# Altium PCB Pigeon.PcbDoc
Units mil, origin at the board's own origin, x right, y up, seen from the top; angles counter-clockwise.
Board outline 1377.95 x 590.55 mil, 2 copper layers (Top Layer, Bottom Layer), stack 46.444 mil thick; 39 components, 32 nets, 124 pads, 27 vias.
Unrouted connection lines stored in the file: 21.
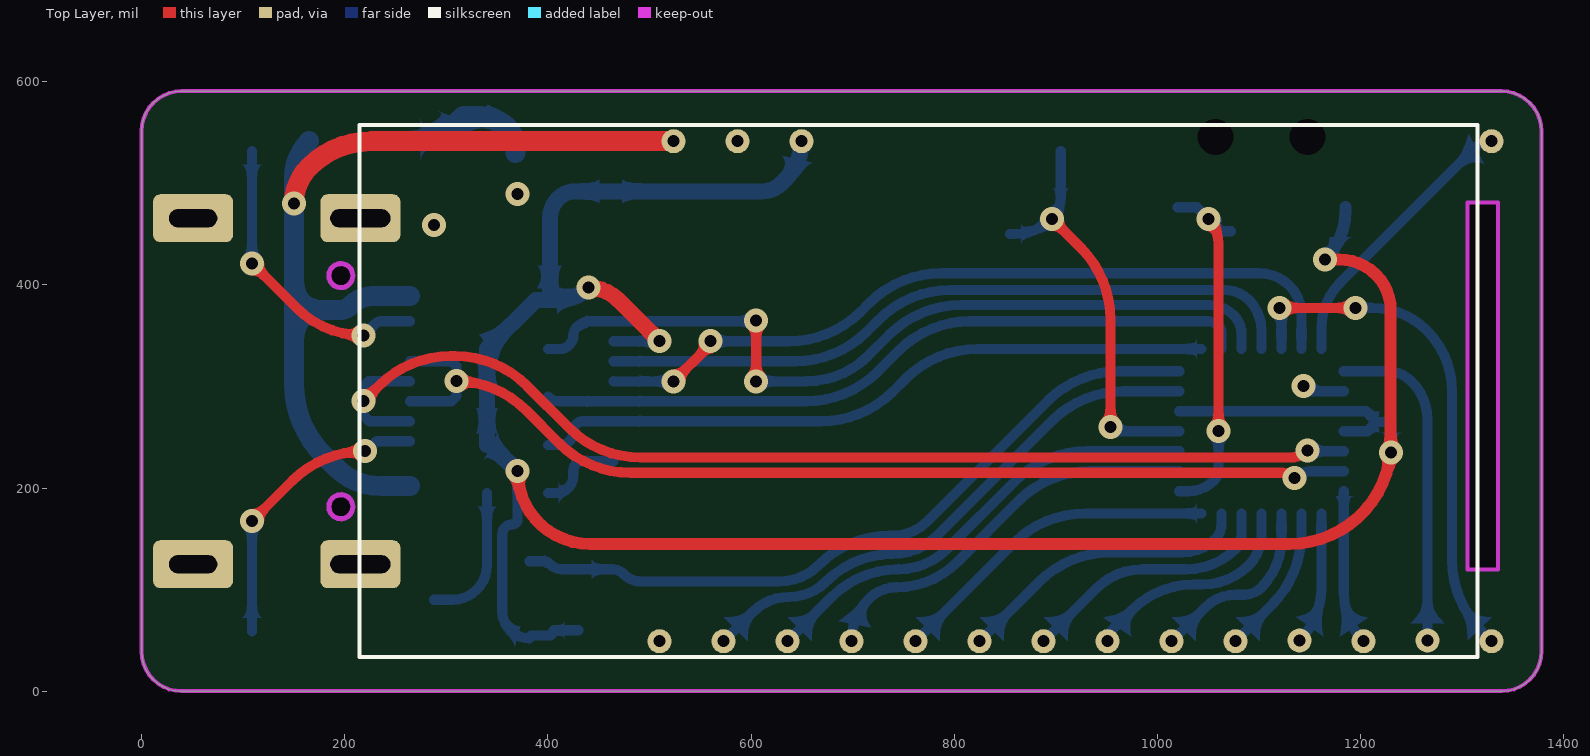
[diagram p0: Top Layer view]
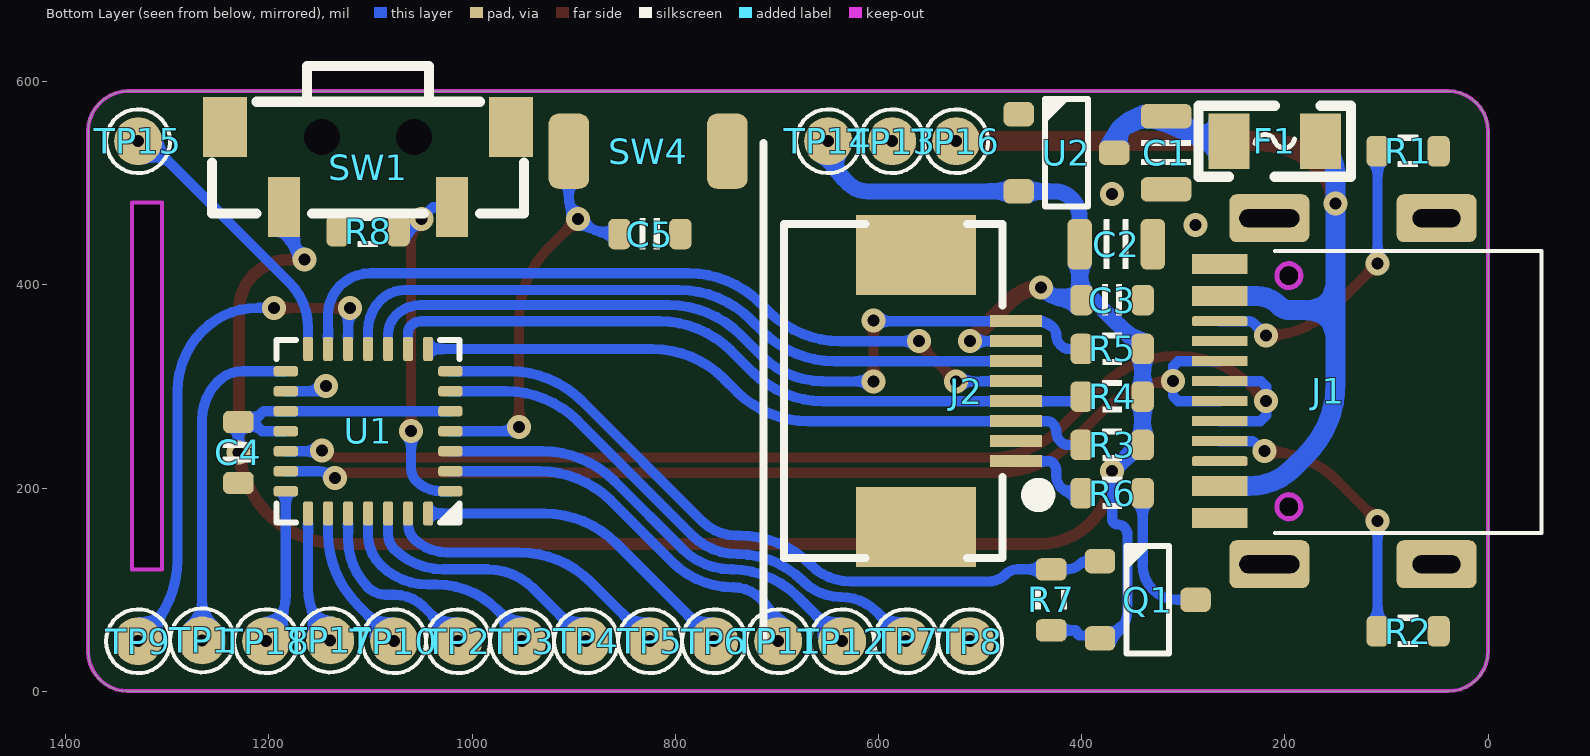
[diagram p1: Bottom Layer view, seen from below]
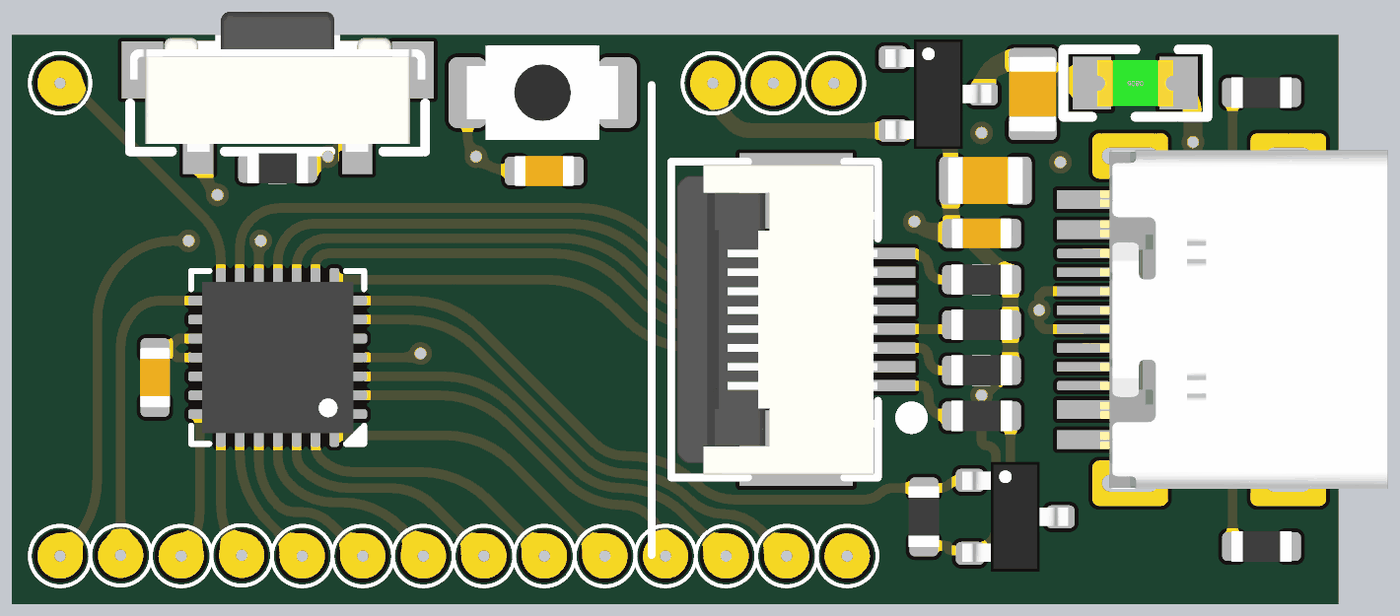
[diagram p2: 3D render of the assembled board from below, using the file's embedded part models]

## Layer stack, top to bottom
Top Solder: solder mask 0.4, Solder Resist, Dk 3.5
Top Layer: signal copper 1.4
Dielectric 1: dielectric 43.6441, FR-4, Dk 14
Bottom Layer: signal copper 1.4
Bottom Solder: solder mask 0.4, Solder Resist, Dk 3.5

## Board outline
39.37,0 cw(c39.37,39.37) 0,39.37 0,551.18 cw(c39.37,551.18) 39.37,590.55 1338.58,590.55 cw(c1338.58,551.18) 1377.95,551.18 1377.95,39.37 cw(c1338.58,39.37) 1338.58,0
cut-out: 1305,120 1335,120 1335,480.95 1305,480.95

## Design rules (kind name [scope] priority, off if disabled: settings)
Clearance Clearance_1 [InPolygon] p1: gap=10 ignorepadtopadclearanceinfootprint=FALSE except(0: Arc-Hole Track-Hole SMDPad-Hole THPad-Hole Via-Hole Fill-Hole Poly-Hole Region-Hole Text-Hole)
Clearance [All] p2: gap=1.97 ignorepadtopadclearanceinfootprint=FALSE except(0: Arc-Hole Track-Hole SMDPad-Hole THPad-Hole Via-Hole Fill-Hole Poly-Hole Region-Hole Text-Hole)
ComponentClearance [All] p1: gap=0 collisioncheckmode=3 verticalgap=0 showdistances=TRUE
PolygonConnect PolygonConnect_1 [IsVia] p1: connectstyle=Direct reliefconductorwidth=10 reliefentries=4 polygonreliefangle="90 Angle" airgapwidth=10
PolygonConnect [All] p2: connectstyle=Relief reliefconductorwidth=10 reliefentries=4 polygonreliefangle="90 Angle" airgapwidth=10
RoutingVias [All] p1: holewidth=28 width=50 viastyle="Through Hole" minholewidth=28 minwidth=50 maxholewidth=28 maxwidth=50
SolderMaskExpansion [All] p1: expansion=4
Width [All] p1: maxlimit=78.74 minlimit=6 preferedwidth=10
29 further rules are at their usual default settings.

## Components (designator, comment, footprint, x,y, rotation, side; value= is the part's Value field where it differs from the comment)
C1 "C0805" CAP_0805 316.86,530 r90 bottom value=10uF
C2 "C0805" CAP_0805 366,440 r0 bottom value=10uF
C3 "C0603" CAP_0603 370,385 r0 bottom value=100nF
C4 "C0603" CAP_0603 1230,235 r90 bottom value=100nF
C5 "C0603" CAP_0603 825,450 r0 bottom value=100nF
F1 "0.5A" "FU 0805" 210,541.34 r0 bottom
J1 "Type_C_16P" Type_C_16P 157.48,295.28 r180 bottom locked
J2 "LH096T-IF09" LH096T-IF09 858.27,295.28 r0 top locked
Q1 "AO3401" SOT23-3 335,90 r180 bottom
R1 "R0603" RES_0603 78.74,531.5 r0 bottom value=5.1K
R2 "R0603" RES_0603 78.74,59.06 r0 bottom value=5.1K
R3 "R0603" RES_0603 370,242.43 r0 bottom value=10K
R4 "R0603" RES_0603 370,290 r0 bottom value=10K
R5 "R0603" RES_0603 370,336.91 r0 bottom value=10K
R6 "R0603" RES_0603 370,195 r180 bottom value=22R
R7 "R0603" RES_0603 430,90 r90 bottom value=10K
R8 "R0603" RES_0603 1102.36,452.76 r0 bottom value=300K
SW1 "3x6x5" "TSW 3*6*4.3-S-W" 1102.36,545.28 r0 bottom locked
SW4 "TACT 2P" ButtonTACT_3x4x2_180 826.77,531.5 r180 bottom locked value=3x4
TP1 "TestPin 1.2R 0.3R" TestPin_1.2R_0.3R 1265.75,50 r180 bottom locked
TP2 "TestPin 1.2R 0.3R" TestPin_1.2R_0.3R 1013.78,49.21 r90 bottom locked
TP3 "TestPin 1.2R 0.3R" TestPin_1.2R_0.3R 950.79,49.21 r90 bottom locked
TP4 "TestPin 1.2R 0.3R" TestPin_1.2R_0.3R 887.8,49.21 r90 bottom locked
TP5 "TestPin 1.2R 0.3R" TestPin_1.2R_0.3R 824.8,49.21 r90 bottom locked
TP6 "TestPin 1.2R 0.3R" TestPin_1.2R_0.3R 761.81,49.21 r90 bottom locked
TP7 "TestPin 1.2R 0.3R" TestPin_1.2R_0.3R 572.83,49.21 r90 bottom locked
TP8 "TestPin 1.2R 0.3R" TestPin_1.2R_0.3R 509.84,49.21 r90 bottom locked
TP9 "TestPin 1.2R 0.3R" TestPin_1.2R_0.3R 1328.74,49.21 r90 bottom locked
TP10 "TestPin 1.2R 0.3R" TestPin_1.2R_0.3R 1076.77,49.21 r90 bottom locked
TP11 "TestPin 1.2R 0.3R" TestPin_1.2R_0.3R 698.82,49.21 r90 bottom locked
TP12 "TestPin 1.2R 0.3R" TestPin_1.2R_0.3R 635.83,49.21 r90 bottom locked
TP13 "TestPin 1.2R 0.3R" TestPin_1.2R_0.3R 586.61,541.34 r90 bottom
TP14 "TestPin 1.2R 0.3R" TestPin_1.2R_0.3R 649.61,541.34 r90 bottom
TP15 "TestPin 1.2R 0.3R" TestPin_1.2R_0.3R 1328.74,541.34 r90 bottom
TP16 "TestPin 1.2R 0.3R" TestPin_1.2R_0.3R 523.62,541.34 r90 bottom
TP17 "TestPin 1.2R 0.3R" TestPin_1.2R_0.3R 1139.76,50 r90 bottom locked
TP18 "TestPin 1.2R 0.3R" TestPin_1.2R_0.3R 1202.76,49.21 r90 bottom locked
U1 "STM32F04xG" QFN_P0.5_28_NOPAD 1102.36,255.91 r0 bottom locked
U2 "XC6206-3.3" SOT23-3 415,530 r180 bottom

## Footprints (in the part's own frame and the unit in brackets; to place one, negate y for a bottom-side part, rotate by r counter-clockwise, add the part's x,y. Pads: shape width x height; smd on the part's side, far side on the other; paste and mask are expansions set on the pad)
ButtonTACT_3x4x2_180 [mil]
  rrect50% 40x74 smd: 1(-78,0) 2(78,0)
  body extent -79,-49 79,49, height 63
CAP_0603 [mil]
  rrect50% 22x30 smd: 1(-30,0) 2(30,0)
  silkscreen extent -10,-15 10,15, body extent -31,-16 31,16, height 31
CAP_0805 [mil]
  rrect50% 24x50 smd: 1(-36,0) 2(36,0)
  silkscreen extent -12,-24 12,24, body extent -39,-25 39,25, height 39
"FU 0805" [mil] "贴片保险丝"
  rect 40x55 smd: 1(-45,0) 2(45,0)
  silkscreen extent -75,-35 75,35, body extent -39,-24 39,24, height 20
LH096T-IF09 [mm] "ST7735S 80*160 RGB"
  rect 3x2 smd far side: 0(-7.503,-3.4) 0(-7.503,3.4) 0(-7.503,3.4) 0(-7.503,-3.4)
  rect 1.3x0.3 smd far side: 1(-10,-1.75) 1(-10,-1.75) 2(-10,-1.25) 2(-10,-1.25) 3(-10,-0.75) 3(-10,-0.75) 4(-10,-0.25) 4(-10,-0.25) 5(-10,0.25) 5(-10,0.25) 6(-10,0.75) 6(-10,0.75) 7(-10,1.25) 7(-10,1.25) 8(-10,1.75) 8(-10,1.75)
  silkscreen extent -16.35,-6.65 11.6,6.65, body extent -16.35,-6.65 11.6,6.65, height 1.5
QFN_P0.5_28_NOPAD [mil]
  rrect50% 24x10 smd: 1(-81,59.06) 2(-81,39.37) 3(-81,19.68) 4(-81,0) 5(-81,-19.68) 6(-81,-39.37) 7(-81,-59.06) 15(81,-59.06) 16(81,-39.37) 17(81,-19.68) 18(81,0) 19(81,19.68) 20(81,39.37) 21(81,59.06)
  rrect50% 10x24 smd: 8(-59.06,-81) 9(-39.37,-81) 10(-19.68,-81) 11(0,-81) 12(19.68,-81) 13(39.37,-81) 14(59.06,-81) 22(59.06,81) 23(39.37,81) 24(19.68,81) 25(0,81) 26(-19.68,81) 27(-39.37,81)
  rrect50% 9.84x24 smd: 28(-59.06,81)
  silkscreen extent -90,-90 90,90, body extent -79,-79 79,79, height 22
RES_0603 [mil]
  rrect50% 22x30 smd: 1(-30,0) 2(30,0)
  silkscreen extent -10,-16 10,16, body extent -31,-16 31,16, height 18
SOT23-3 [mil]
  rrect50% 30x24 smd: 1(-47,38) 2(-47,-38) 3(47,0)
  silkscreen extent -21,-53 21,53, body extent -55,-57 55,57, height 51
TestPin_1.2R_0.3R [mm]
  round 1.2 / inner round 1.2 / far side round 0.6 hole 0.3: 0(0,0)
  silkscreen extent -0.8,-0.8 0.8,0.8
"TSW 3*6*4.3-S-W" [mm] "侧立贴片3*6*4.3"
  rect 1.1x1.5 smd: 0(-3.575,-0.25) 0(3.575,-0.25)
  round 0 hole 0.9: 0(-1.15,0) 0(1.15,0)
  rect 0.8x1.5 smd: 1(2.1,1.75) 2(-2.1,1.75)
  silkscreen extent -3.9,-1.78 3.9,1.91, body extent -3.9,-1.79 3.9,1.91, height 3.51
Type_C_16P [mm]
  rrect30% 2x1.2 hole 0.45 slot 1.5 at 0 deg: 0(-1.47,-4.325) 0(-1.47,4.325)
  rrect30% 2x1.2 hole 0.45 slot 1.2 at 0 deg: 0(2.71,-4.325) 0(2.71,4.325)
  rect 1.397x0.5 smd: A1B12(-2.71,-3.175) A4B9(-2.71,-2.375) A9B4(-2.71,2.375) A12B1(-2.71,3.175)
  rect 1.397x0.25 smd: A5(-2.71,-1.25) A6(-2.71,-0.25) A7(-2.71,0.25) A8(-2.71,1.25) B6(-2.71,0.75) B7(-2.71,-0.75)
  rrect50% 1.397x0.25 smd: B5(-2.71,1.75) B8(-2.71,-1.75)
  Keep-Out Layer board cut-out: -0.983,-2.587 -1.098,-2.61 -1.195,-2.675 -1.26,-2.773 -1.283,-2.887 -1.283,-2.887 -1.26,-3.002 -1.195,-3.1 -1.098,-3.165 -0.983,-3.187 -0.983,-3.187 -0.868,-3.165 -0.771,-3.1 -0.706,-3.002 -0.683,-2.887 -0.683,-2.887 -0.706,-2.773 -0.771,-2.675 -0.868,-2.61 -0.983,-2.587
  Keep-Out Layer board cut-out: -0.983,3.19 -1.098,3.168 -1.195,3.103 -1.26,3.005 -1.283,2.89 -1.283,2.89 -1.26,2.776 -1.195,2.678 -1.098,2.613 -0.983,2.59 -0.983,2.59 -0.868,2.613 -0.771,2.678 -0.706,2.776 -0.683,2.89 -0.683,2.89 -0.706,3.005 -0.771,3.103 -0.868,3.168 -0.983,3.19
  Keep-Out Layer circle w0.127: c-0.983,2.89 r0.3
  Keep-Out Layer circle w0.127: c-0.983,-2.887 r0.3
  silkscreen extent -1.33,-3.55 5.34,3.5, body extent -2.27,-4.47 5.33,4.47, height 3.28

## Part data
C1 C2: library part Cap_0805, "Capacitor", Specification="X7R 50V", type=0805
C3 C4 C5: library part Cap_0603, "Capacitor", Specification="X7R 50V", type=0603
F1: library part FU, "自恢复 0.5A C75464", BOM名称=贴片保险丝, 学习资源=www.ooocke.com, 版权归属=源创客
R1 R2: library part Res_0603, "Resistor 5%", Specification=±5%, type=0603
R3 R4 R5 R6 R7 R8: library part Res_0603, "Resistor", Specification=±5%, type=0603
SW1: library part "TSW 3x6", "3x6轻触开关", BOM名称=3x6轻触开关, 学习资源=www.ooocke.com, 版权归属=源创客
SW4: library part ButtonTACT_3x4x2_180, "Button", type="TACT 2P"
U1: "MCU"

## Via types
v1: diameter 23.62, hole 11.81, Top Layer to Bottom Layer, tented both sides, 27 vias

## Nets (pads, with @x,y where several pads share a name; then routed paths per layer and width w, separated by ;. In a path a pad name is that pad's centre, name@x,y a point inside that pad or via, vN(x,y) a via of type N, cw(c..) or ccw(c..) an arc to the next point about the centre after c; other vN are vias at no path point)
3V3: C2.2 C3.2 C4.2 J2.7 Q1.2 R3.1 R4.1 R5.1 R7.1 SW1.1 TP14.0 U1.5 U1.17 U1.18 U2.2 | length 2535.4
  Top Layer w11.81: v1(370,216.54) ccw(c441.54,216.54) 441.54,145 1130,145 ccw(c1130,245) v1@1229.5,235.05 ; v1(1165,425) 1178.79,425 cw(c1178.79,373.79) 1215,410 cw(c1179.99,374.99) 1229.5,374.99 v1@1229.5,235.05 ; v1@1230,245 cw(c1130,245) v1@1229.5,235.05
  Top Layer w15.75: v1(440,397.26) cw(c440,356.05) 469.14,385.19 v1(509.84,344.49)
  Bottom Layer w10: v1(370,216.54) 370,169.26 cw(c365,169.26) 365,164.26 ccw(c365,154.26) 355,154.26 355,79 ccw(c382,79) Q1.2 cw(c385,52) 385,55 401.34,55 ccw(c401.34,58.66) 405,58.66 cw(c406.34,58.66) 406.34,60 R7.1 ; J2.7@464.57,344.49 v1(509.84,344.49) ; U1.5 U1.17 1205.32,275.59 C4.2@1215.91,265 ; U1.18 1206.81,255.91 C4.2@1215.91,265 ; v1(1230,235) C4.2 C4.2@1215.91,265
  Bottom Layer w11.81: v1(1165,425) ccw(c1116.62,473.38) 1185.04,473.38 SW1.1
  Bottom Layer w15.75: v1(370,216.54) 344.1,242.43 R3.1 R4.1 R5.1 388.09,385 C3.2 ; v1(440,397.26) cw(c410.4,426.86) 410.4,385 C3.2 ; TP14.0 cw(c597.14,541.34) 634.25,504.25 630,500 cw(c610.69,519.31) 610.69,492 U2.2 426.9,492 ccw(c426.9,468.1) 410,485 ccw(c429.31,465.69) 402,465.69 C2.2 402,389.83 cw(c395.17,389.83) C3.2
GND: C1.1 C2.1 C3.1 C4.1 C5.1 J1.0 J1.A1B12 J1.A12B1 J2.2 R1.1 R2.1 R8.2 SW4.2 TP8.0 TP13.0 U1.16 U2.1 | length 44.7
  Bottom Layer w10: v1(1143.91,300.48) 1143.91,295.28 U1.16
  other v1: 288,459 370,489.58
KEY1: R8.1 SW1.2 U1.1 | length 360.9
  Top Layer w10: v1(1050,465) cw(c1025.86,440.86) 1060,440.86 v1(1060,255.91)
  Bottom Layer w10: SW1.2 1038.62,476.38 v1(1050,465) 1062.24,452.76 R8.1 ; U1.1 1030.66,196.85 ccw(c1030.66,231.27) 1055,206.93 ccw(c1042.93,219) 1060,219 v1(1060,255.91)
LCD_BK: Q1.1 R7.2 U1.7 | length 717.5
  Bottom Layer w10: Q1.1 394.76,128 cw(c394.76,117.76) 402,125 ccw(c414.07,137.07) 414.07,120 R7.2 462.93,120 cw(c462.93,102.93) 475,115 ccw(c492,132) 492,107.96 627.48,107.96 ccw(c627.48,162.81) 666.27,124.03 cw(c736.98,53.32) 736.98,153.32 740,153.32 ccw(c740,200.52) 773.38,167.14 891.91,285.67 cw(c962.62,214.96) 962.62,314.96 U1.7
LCD_RS: J2.4 R4.2 U1.9 | length 710.2
  Bottom Layer w10: R4.2 ccw(c411.03,301.03) 411.03,285.43 464.57,285.43 654.05,285.43 ccw(c654.05,385.43) 724.76,314.72 744.92,334.88 cw(c815.63,264.17) 815.63,364.17 1049.93,364.17 cw(c1049.93,349.93) 1060,360 cw(c1052.78,352.78) 1062.99,352.78 U1.9
LCD_RST: J2.3 R3.2 U1.8 | length 678
  Bottom Layer w10: R3.2 413.8,242.43 ccw(c413.8,251.2) 419.99,244.99 421.46,246.46 ccw(c412.93,255) 425,255 cw(c437.07,255) 428.54,263.54 cw(c433.88,258.19) 433.88,265.75 464.57,265.75 668.89,265.75 ccw(c668.89,365.75) 739.6,295.04 752.18,307.62 cw(c822.89,236.91) 822.89,336.91 U1.8
NetC1_2: C1.2 F1.2 U2.3 | length 141.8
  Bottom Layer w19.68: F1.2 257.32,541.34 ccw(c257.32,625.54) C1.2 333.73,566 cw(c333.73,528.85) 360,555.12 cw(c340.69,535.8) 368,535.8 U2.3
NetJ1_A5: J1.A5 R2.2 | length 291.8
  Top Layer w10: v1(108.74,167.5) 148.17,206.93 cw(c218.88,136.22) 218.88,236.22 v1(220,236.22)
  Bottom Layer w10: R2.2 v1(108.74,167.5) ; v1(220,236.22) ccw(c220,239.17) 222.08,237.08 230,245 cw(c232.57,242.43) 232.57,246.06 J1.A5
NetJ1_B5: J1.B5 R1.2 | length 296.8
  Top Layer w10: v1(108.74,421.16) 152.59,377.31 ccw(c218.44,443.16) v1(218.44,350.03)
  Bottom Layer w10: v1(108.74,421.16) R1.2 ; v1(218.44,350.03) 230.4,361.99 cw(c235.67,356.72) 235.67,364.17 J1.B5
NetJ2_1: J2.1 R6.1 | length 85
  Bottom Layer w10: R6.1 407.93,195 ccw(c407.93,212.07) 420,200 ccw(c407.93,212.07) 425,212.07 425,216.46 cw(c437.07,216.46) 428.54,225 cw(c431.86,221.67) 431.86,226.38 J2.1@464.57,226.38
NetQ1_3: Q1.3 R6.2 | length 142.3
  Bottom Layer w10: Q1.3 305.86,90 ccw(c305.86,124.14) 330,100 ccw(c305.86,124.14) 340,124.14 R6.2
NRST: C5.2 SW4.1 U1.4 | length 407.2
  Top Layer w10: v1(895.99,465) 924.41,436.58 cw(c853.7,365.87) 953.7,365.87 v1(953.7,260)
  Bottom Layer w10: C5.2 859.77,450 ccw(c859.77,501.21) v1(895.99,465) ccw(c874.78,486.21) 904.77,486.21 SW4.1 ; v1(953.7,260) ccw(c963.58,269.89) 963.58,255.91 U1.4
PA0: TP7.0 U1.6 | length 535.1
  Bottom Layer w10: TP7.0 601.72,78.09 ; 601.73,78.1 cw(c637.36,42.46) 637.36,92.86 ccw(c637.36,144.42) 673.82,107.96 cw(c739.1,42.68) 739.1,135 ccw(c739.1,197.53) 783.32,153.32 895.99,265.99 cw(c966.7,195.28) 966.7,295.28 U1.6
PA6: TP9.0 U1.12 | length 516.2
  Top Layer w10: v1(1120,377.31) v1(1195,377.31)
  Bottom Layer w10: v1(1120,377.31) cw(c1115.06,372.37) 1122.05,372.37 U1.12 ; v1(1195,377.31) 1211.51,377.31 cw(c1211.51,301.66) 1265,355.16 cw(c1204.64,294.8) 1290,294.8 1290,129.37 ccw(c1390,129.37) 1319.29,58.66 TP9.0
PA13: TP18.0 U1.21 | length 152.8
  Bottom Layer w10: U1.21 1183.36,96.03 ccw(c1249.58,96.03) TP18.0
PA14: TP17.0 U1.22 | length 130.7
  Bottom Layer w10: TP17.0 ccw(c1087.49,102.28) 1161.42,102.28 U1.22
PA15: TP10.0 U1.23 | length 148.3
  Bottom Layer w10: TP10.0 1112.44,84.88 ccw(c1041.73,155.59) 1141.73,155.59 U1.23
PB0: TP15.0 U1.14 | length 275.7
  Bottom Layer w10: U1.14 1161.42,357.52 cw(c1224.86,357.52) 1180,402.38 1312.04,534.42 cw(c1328.74,517.72) TP15.0
PB1: TP1.0 U1.15 | length 328.5
  Bottom Layer w10: U1.15 1225.95,314.96 cw(c1225.95,280.95) 1250,305 cw(c1211.98,266.98) 1265.75,266.98 TP1.0
PB3: TP2.0 U1.24 | length 185.6
  Bottom Layer w10: TP2.0 1047.4,82.83 cw(c1076.77,53.46) 1076.77,95 1084.8,95 ccw(c1084.8,119.84) 1102.36,102.28 ccw(c1054.84,149.8) 1122.05,149.8 U1.24
PB4: TP3.0 U1.25 | length 221
  Bottom Layer w10: TP3.0 cw(c966.66,49.21) 955.44,60.44 975.25,80.25 cw(c1035,20.5) 1035,105 1043.79,105 ccw(c1043.79,170.36) 1090,124.14 ccw(c1060.16,153.99) 1102.36,153.99 U1.25
PB5: TP4.0 U1.26 | length 257.4
  Bottom Layer w10: TP4.0 939.9,101.32 cw(c985,56.22) 985,120 1028.49,120 ccw(c1028.49,188.28) 1076.77,140 ccw(c1062.51,154.26) 1082.68,154.26 U1.26
PB6: TP5.0 U1.27 | length 294.3
  Bottom Layer w10: TP5.0 882.99,107.4 cw(c953.7,36.69) 953.7,136.69 1024.95,136.69 ccw(c1024.95,182.14) 1057.09,150 ccw(c1042.83,164.26) 1062.99,164.26 U1.27
PB7: TP6.0 U1.28 | length 329.3
  Bottom Layer w10: TP6.0 858.21,145.62 cw(c928.93,74.91) 928.93,174.91 U1.28
PF0: TP11.0 U1.2 | length 394.1
  Bottom Layer w10: TP11.0 cw(c758.22,49.21) 716.22,91.22 cw(c742.91,64.52) 742.91,102.28 ccw(c742.91,187.03) 802.84,127.1 862.99,187.25 cw(c933.7,116.54) 933.7,216.54 U1.2
PF1: TP12.0 U1.3 | length 451.8
  Bottom Layer w10: TP12.0 679.47,92.86 cw(c745,27.33) 745,120 ccw(c745,187.43) 792.68,139.75 859.86,206.93 cw(c930.57,136.22) 930.57,236.22 U1.3
SPI_CS1: J2.8 R5.2 U1.10 | length 811.2
  Top Layer w10: v1(605,305) v1(605,365)
  Bottom Layer w10: R5.2 412.53,336.91 ccw(c412.53,347.47) 420,340 421.46,341.46 ccw(c412.93,350) 425,350 cw(c437.07,350) 428.54,358.54 cw(c442.15,344.93) 442.15,364.17 464.57,364.17 604.17,364.17 v1(605,365) ; v1(605,305) 654.65,305 654.76,305.12 654.88,305 655,305.12 ccw(c655,389.9) 714.95,329.95 735.71,350.71 cw(c806.42,280) 806.42,380 1050.86,380 cw(c1050.86,345.86) 1075,370 cw(c1056.47,351.47) 1082.68,351.47 U1.10
SPI_MOSI: J2.5 U1.13 | length 771.1
  Top Layer w10: v1(523.62,305) 557.8,339.18 ccw(c552.49,344.49) v1(560,344.49)
  Bottom Layer w10: J2.5@464.57,305.12 464.69,305 v1(523.62,305) ; v1(560,344.49) 637.36,344.49 ccw(c637.36,444.49) 708.07,373.78 716.42,382.13 cw(c787.13,311.42) 787.13,411.42 1100.16,411.42 cw(c1100.16,369.21) 1130,399.06 cw(c1101.68,370.73) 1141.73,370.73 U1.13
SPI_SCK: J2.6 U1.11 | length 700
  Bottom Layer w10: J2.6@464.57,324.8 643.38,324.8 ccw(c643.38,424.8) 714.09,354.09 725.71,365.71 cw(c796.42,295) 796.42,395 1065.86,395 cw(c1065.86,360.86) 1090,385 cw(c1060.16,355.16) 1102.36,355.16 U1.11
USB_DM: J1.A7 J1.B7 U1.19 | length 1138.5
  Top Layer w10: v1(218.44,285.43) 233.72,300.71 cw(c304.43,230) 304.43,330 308.58,330 cw(c308.58,230) 379.29,300.71 420.71,259.29 ccw(c491.42,330) 491.42,230 1130.54,230 ccw(c1130.54,254.18) v1(1147.64,237.08)
  Bottom Layer w10: J1.B7 224.25,265.75 218.44,271.56 v1(218.44,285.43) 218.44,300 223.56,305.12 J1.A7 ; v1(1147.64,237.08) ccw(c1149.72,239.17) 1149.72,236.22 U1.19
USB_DP: J1.A6 J1.B6 U1.20 | length 1030.5
  Top Layer w10: v1(310,305.12) cw(c310,208.84) 378.08,276.92 410.71,244.29 ccw(c481.42,315) 481.42,215 1122.93,215 cw(c1122.93,197.93) v1(1135,210)
  Bottom Layer w10: J1.A6 305,285.43 310,290.43 v1(310,305.12) 310,319.8 305,324.8 J1.B6 ; v1(1135,210) cw(c1150.78,194.22) 1150.78,216.54 U1.20
VIN: F1.1 J1.A4B9 J1.A9B4 TP16.0 | length 939
  Top Layer w19.68: v1(150,480) cw(c200.86,480) 164.9,515.96 cw(c226.16,454.69) 226.16,541.34 TP16.0
  Bottom Layer w19.68: F1.1 ccw(c201.21,505.13) 150,505.13 v1(150,480) 150,375 ; J1.A4B9 235.67,201.77 cw(c235.67,264.01) 191.66,220 179.29,232.38 cw(c250,303.09) 150,303.09 150,375 ; J1.A9B4 227.39,388.78 ccw(c227.39,358.8) 206.2,380 cw(c194.13,392.07) 194.13,375 150,375
pads on no net: J1.A8 J1.B8 J2.0 SW1.0

## Keep-outs
Keep-Out Layer:
  lines w3.94: 0,39.37 ccw(c39.37,39.37) 39.37,0 1338.58,0 ccw(c1338.58,39.37) 1377.95,39.37 1377.95,551.18 ccw(c1338.58,551.18) 1338.58,590.55 39.37,590.55 ccw(c39.37,551.18) 0,551.18 0,39.37 ; 1305,120 1335,120 1335,480.95 1305,480.95 1305,120

## Other copper
Bottom Layer:
  pour cut-out: 70.04,68.56 110.12,68.56 110.12,50.68 70.04,50.68
  pour cut-out: 70.04,541 110.12,541 110.12,523.12 70.04,523.12
  pour cut-out: 858.05,155.9 919.43,155.9 919.43,138.02 858.05,138.02
  pour cut-out: 1021.36,336.91 1183.36,336.91 1183.36,174.91 1021.36,174.91
  pour cut-out: 1072.36,462.26 1111.06,462.26 1111.06,444.38 1072.36,444.38
  pour cut-out: 816.3,459.5 856.38,459.5 856.38,441.62 816.3,441.62
  pour cut-out: 382,128 443.38,128 443.38,60 382,60
  pour cut-out: 279,372.37 333.33,372.37 333.33,181.93 279,181.93

## Silkscreen, mask and mechanical layers (free items; w line width, h text height)
Top Solder:
  text "A" at 5,260 h122.05
  text "GUGUGU" at -5,236.22 h27.56
Bottom Solder:
  text "客户编号位置" at 10,393.7 h39.37 r270